# EAGLE board circuito004 (EAGLE 7.6.0)

Size 56.82 x 53.33 mm. Coordinates in mm from the lower left corner, seen from the top.
Outline: 0,0 56.82,0 56.82,53.33 0,53.33 0,0
Copper layers (1*16): Top 0.035mm / dielectric 1.5mm / Bottom 0.035mm
Design rules "default": minimum track width 10mil, minimum drill 24mil, track to track 8mil, track to pad 8mil, pad to pad 8mil, via to via 8mil, smd to smd 8mil, copper to edge 40mil, drill to drill 8mil, minimum pad ring 10mil, minimum via ring 8mil, stop-mask expansion 4mil, vias tented up to drill 0mil, thermal gap 10mil

## Footprints (pad centres in the part's own frame; a part is rotated, then mirrored left to right if it is on the bottom)
LED5MM = drill 0.813 octagon: A -1.27,0; K 1.27,0
2P-2.54-65/35MIL = drill 0.889 pad 1.651 square: 1 0,1.27 | drill 0.889 pad 1.651: 2 0,-1.27
0207/10 = drill 0.813 octagon: 1 -5.08,0; 2 5.08,0
M251 = drill 0.813 long: 1 -2.54,0; 2 0,0; 3 2.54,0
TL1105 = drill 1 pad 1.676: 1 -2.25,3.25; 2 2.25,3.25; 3 -2.25,-3.25; 4 2.25,-3.25
DIL14 = drill 0.813 long: 1 -7.62,-3.81; 2 -5.08,-3.81; 3 -2.54,-3.81; 4 0,-3.81; 5 2.54,-3.81; 6 5.08,-3.81; 7 7.62,-3.81; 8 7.62,3.81; 9 5.08,3.81; 10 2.54,3.81; 11 0,3.81; 12 -2.54,3.81; 13 -5.08,3.81; 14 -7.62,3.81

## Placement (x,y rotation side)
D1  [LED5MM]  5,73.58 0 top  (outside the outline)
D2  [LED5MM]  5,86.28 0 top  (outside the outline)
D3  [LED5MM]  5,98.98 0 top  (outside the outline)
D4  [LED5MM]  5,111.68 0 top  (outside the outline)
D5  [LED5MM]  5,124.38 0 top  (outside the outline)
D6  [LED5MM]  5,137.08 0 top  (outside the outline)
D7  [LED5MM]  5,149.78 0 top  (outside the outline)
D8  [LED5MM]  5,162.48 0 top  (outside the outline)
P1  5V  [2P-2.54-65/35MIL]  5,60.88 0 top  (outside the outline)
R1  220‎Ω  [0207/10]  5,175.18 0 top  (outside the outline)
R2  10k‎Ω  [0207/10]  5,213.28 0 top  (outside the outline)
S1  [M251]  5,187.88 0 top  (outside the outline)
S2  [TL1105]  5,200.58 0 top  (outside the outline)
U1  [DIL14]  5,10.08 0 top
U2  [DIL14]  5,22.78 0 top
U3  [DIL14]  5,35.48 0 top
U4  [DIL14]  5,48.18 0 top

## Library data of the parts
D1-D8 P1 R1 R2 S1 S2 U1-U4 = AUTODESK_CIRCUITS_BREADBOARD

## Nets
N$1: P1.2 R2.1 S1.1 U1.1 U1.4 U1.10 U1.13 U1.14 U2.1 U2.4 U2.10 U2.13 U2.14 U3.1 U3.4 U3.10 U3.13 U3.14 U4.1 U4.4 U4.10 U4.13 U4.14
N$2: P1.1 R1.1 S1.3 S2.2 U1.7 U2.7 U3.7 U4.7
N$3: D1.K D2.K D3.K D4.K D5.K D6.K D7.K D8.K R1.2
N$4: D1.A U1.5 U1.12
N$5: D2.A U1.9 U2.2
N$6: D3.A U2.5 U2.12
N$7: D4.A U2.9 U3.2
N$8: D5.A U3.5 U3.12
N$9: D6.A U3.9 U4.2
N$10: D7.A U4.5 U4.12
N$11: D8.A U4.9
N$12: R2.2 S2.3 U1.3 U1.11 U2.3 U2.11 U3.3 U3.11 U4.3 U4.11
N$13: S1.2 U1.2

## Tracks (layer width: path | path; a pad name or v marks a point on that pad's centre or on a via)
N$1  (22 unrouted)
N$2  (7 unrouted)
N$3  (8 unrouted)
N$4  (2 unrouted)
N$5  (2 unrouted)
N$6  (2 unrouted)
N$7  (2 unrouted)
N$8  (2 unrouted)
N$9  (2 unrouted)
N$10  (2 unrouted)
N$11  (1 unrouted)
N$12  (9 unrouted)
N$13  (1 unrouted)